# Altium PCB Programmer.PcbDoc
Units mm, origin at the board's own origin, x right, y up, seen from the top; angles counter-clockwise.
Board outline 20.57 x 33.15 mm, 2 copper layers (Top Layer, Bottom Layer); 3 components, 6 nets, 32 pads, 0 vias.
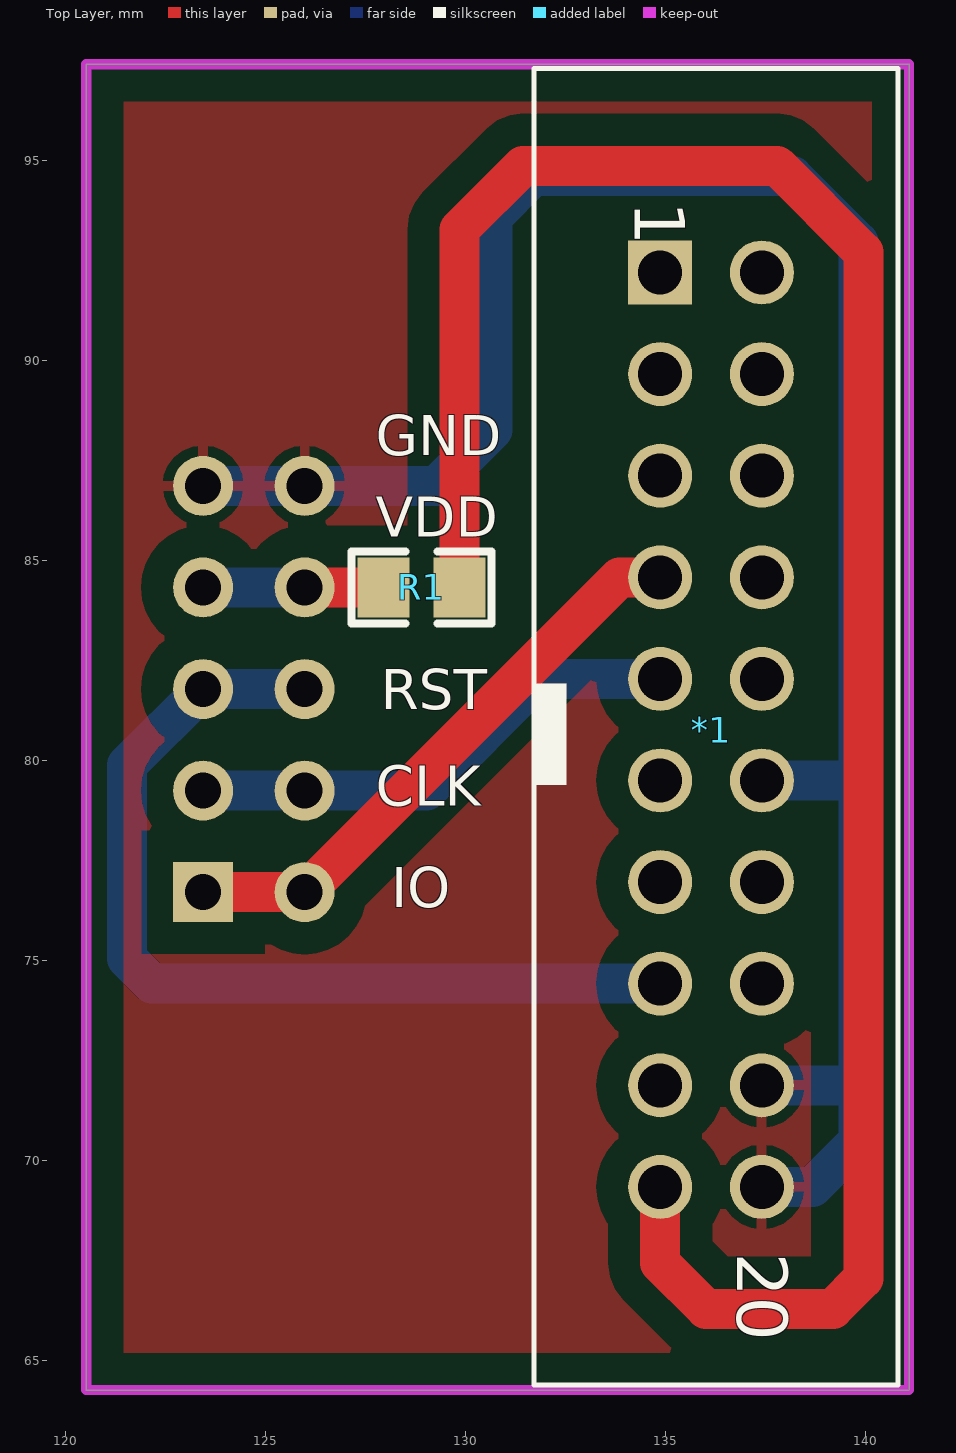
[diagram p0: Top Layer view]
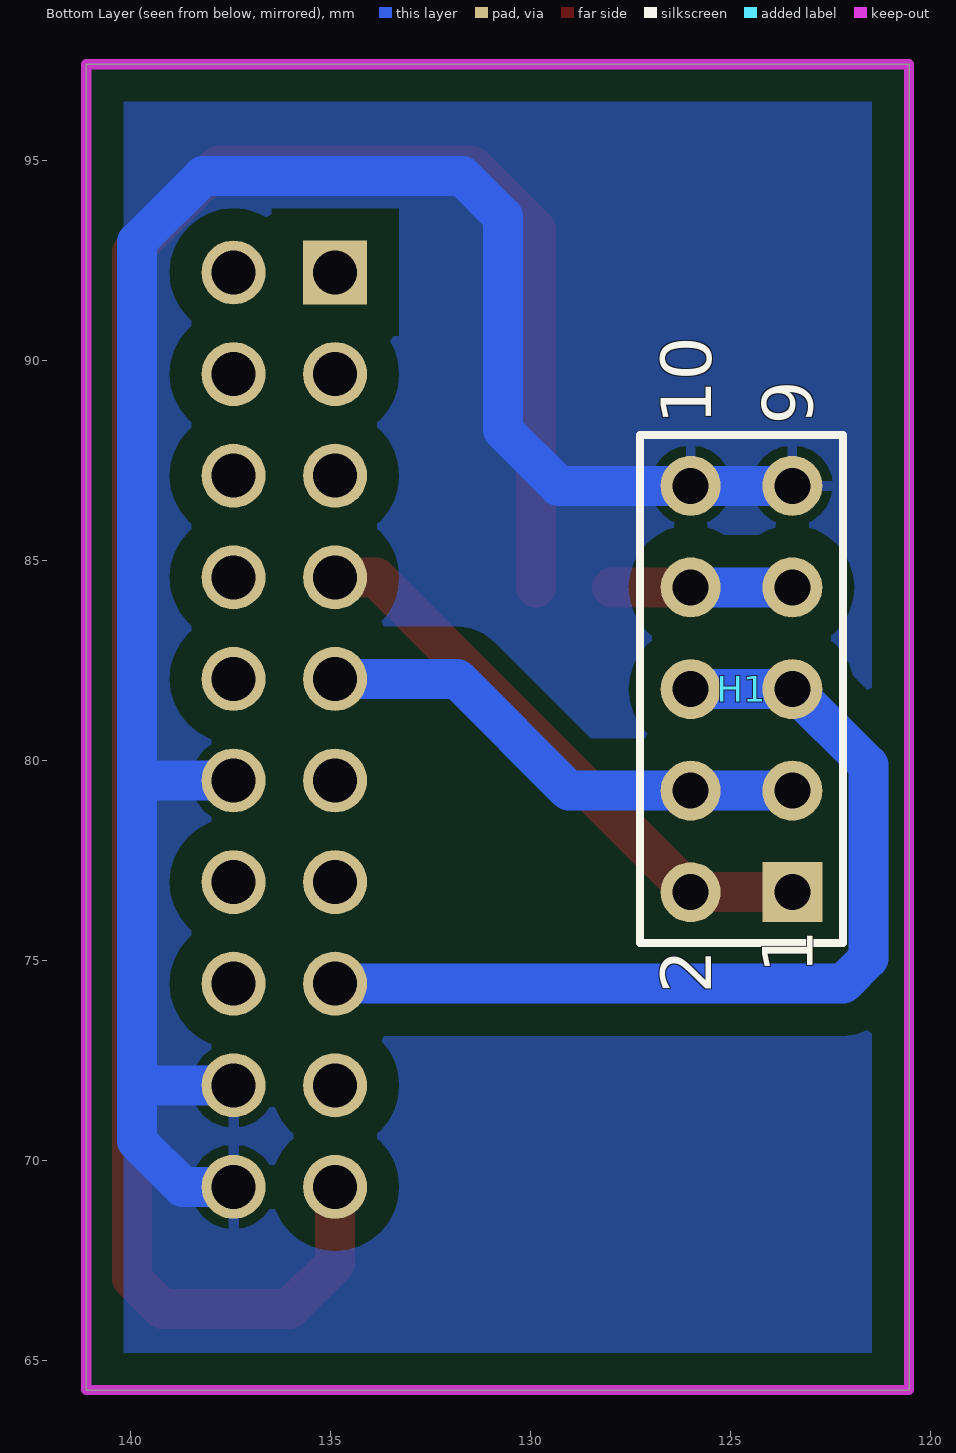
[diagram p1: Bottom Layer view, seen from below]

## Layer stack, top to bottom
Top Layer: signal copper 0.0356
Dielectric: dielectric 0.32, FR-4, Dk 4.8
Bottom Layer: signal copper 0.0356

## Board outline
120.523,64.262 120.523,97.409 141.097,97.409 141.097,64.262

## Design rules (kind name [scope] priority, off if disabled: settings)
Clearance [All] p1: gap=0.8
PolygonConnect [All] p1: connectstyle=Relief reliefconductorwidth=0.254 reliefentries=4 polygonreliefangle="90 Angle"
RoutingVias [All] p1: holewidth=0.711 width=1.27 viastyle="Through Hole" minholewidth=0.711 minwidth=1.27 maxholewidth=0.711 maxwidth=1.27
SilkscreenOverComponentPads SilkToSolderMaskClearance [IsPad] p1: minsilkscreentomaskgap=0.254
SolderMaskExpansion [All] p1: expansion=0.102
Width [All] p1: maxlimit=4 minlimit=0.254 preferedwidth=0.254 minimp=50.000000 maximp=50.000000 favimp=50.000000
27 further rules are at their usual default settings.

## Components (designator, comment, footprint, x,y, rotation, side; value= is the part's Value field where it differs from the comment)
*1 "IDC 2X10" "IDC 2X10" 136.144,80.772 r270 top
H1 "Header 5X2" HDR2X5 123.444,76.708 r90 bottom
R1 "0" "RES 0805" 128.905,84.328 r0 top

## Footprints (in the part's own frame and the unit in brackets; to place one, negate y for a bottom-side part, rotate by r counter-clockwise, add the part's x,y. Pads: shape width x height; smd on the part's side, far side on the other; paste and mask are expansions set on the pad)
HDR2X5 [mm] "Connector; Header; 5x2 Position"
  rect 1.5x1.5 hole 0.9: 1(0,0)
  round 1.5 hole 0.9: 2(0,2.54) 3(2.54,0) 4(2.54,2.54) 5(5.08,0) 6(5.08,2.54) 7(7.62,0) 8(7.62,2.54) 9(10.16,0) 10(10.16,2.54)
  silkscreen extent -1.27,-1.27 11.43,3.81, body extent -1.26,-1.27 11.31,3.81, height 8.39
"IDC 2X10" [mm]
  rect 1.6x1.6 hole 1.1: 1(-11.43,-1.27)
  round 1.6 hole 1.1: 2(-11.43,1.27) 3(-8.89,-1.27) 4(-8.89,1.27) 5(-6.35,-1.27) 6(-6.35,1.27) 7(-3.81,-1.27) 8(-3.81,1.27) 9(-1.27,-1.27) 10(-1.27,1.27) 11(1.27,-1.27) 12(1.27,1.27) 13(3.81,-1.27) 14(3.81,1.27) 15(6.35,-1.27) 16(6.35,1.27) 17(8.89,-1.27) 18(8.89,1.27) 19(11.43,-1.27) 20(11.43,1.27)
  silkscreen extent -16.53,-4.42 16.38,4.68, body extent -16.4,-4.08 16.3,4.42, height 9
"RES 0805" [mm] "Chip Resistor, 2-Leads, Body 2.0x1.3mm, IPC High Density _ (0.100 W)"
  rect 1.3x1.5 smd: 1(-0.95,0) 2(0.95,0)
  silkscreen extent -1.75,-0.9 1.75,0.9, body extent -1,-0.62 1,0.63, height 0.55

## Part data
H1: "Header, 5-Pin, Dual row"
R1: library part Res, "Resistor"

## Nets (pads, with @x,y where several pads share a name; then routed paths per layer and width w, separated by ;. In a path a pad name is that pad's centre, name@x,y a point inside that pad or via, vN(x,y) a via of type N, cw(c..) or ccw(c..) an arc to the next point about the centre after c; other vN are vias at no path point)
GND: *1.12 *1.18 *1.20 H1.9 H1.10 | length 53.2
  Bottom Layer w1: H1.9@123.952,86.868 129.286,86.868 130.683,88.265 130.683,93.599 131.699,94.615 138.176,94.615 139.827,92.964 139.827,79.756 ; *1.20 138.684,69.342 139.827,70.485 139.827,72.009 ; *1.18 139.7,71.882 139.827,72.009 ; *1.12 139.573,79.502 139.827,79.756 ; 139.827,72.009 139.827,79.756
Net*1_19: *1.19 R1.2 | length 54
  Top Layer w1: R1.2 129.855,93.279 131.445,94.869 137.795,94.869 139.954,92.71 139.954,67.056 139.192,66.294 136.017,66.294 134.874,67.437 *1.19
RESET: *1.15 H1.5 H1.6 | length 23.7
  Bottom Layer w1: H1.6 H1.5 121.539,79.883 121.539,75.057 122.174,74.422 *1.15
SWCLK: *1.9 H1.3 H1.4 | length 12.1
  Bottom Layer w1: H1.3@123.952,79.248 129.032,79.248 131.826,82.042 *1.9
SWDIO: *1.7 H1.1 H1.2 | length 14.2
  Top Layer w1: H1.1@123.952,76.708 H1.2 133.858,84.582 *1.7
VDD: H1.7 H1.8 R1.1 | length 4.5
  Top Layer w1: H1.8 R1.1
  Bottom Layer w1: H1.7 H1.8
pads on no net: *1.1 *1.2 *1.3 *1.4 *1.5 *1.6 *1.8 *1.10 *1.11 *1.13 *1.14 *1.16 *1.17

## Polygon pours and split planes (outlines as drawn)
GND on Bottom Layer "Bottom Layer-No Net" (solid, remove dead copper, pour order 0): 140.97,97.409 120.523,97.409 120.523,64.262 141.097,64.262 141.097,97.409
GND on Top Layer "Bottom Layer-No Net" (solid, remove dead copper, pour order 2): 141.097,97.409 120.523,97.409 120.523,64.262 141.097,64.262 141.097,97.409

## Keep-outs
Keep-Out Layer:
  the board outline again, w0.254

## Silkscreen, mask and mechanical layers (free items; w line width, h text height)
Top Overlay:
  text "GND" at 127.762,87.63 h1
  text "VDD" at 127.762,85.598 h1
  text "RST" at 127.889,81.28 h1
  text "CLK" at 127.762,78.867 h1
  text "IO" at 128.143,76.327 h1
Top Solder:
  rectangle: 127.889,66.068 128.778,66.957
  rectangle: 129.794,66.068 130.683,66.957
  rectangle: 127.889,67.815 128.778,68.704
  rectangle: 129.794,67.815 130.683,68.704
  rectangle: 127.889,69.561 128.778,70.45
  rectangle: 129.794,69.561 130.683,70.45
  rectangle: 127.889,71.307 128.778,72.196
  rectangle: 129.794,71.307 130.683,72.196
  rectangle: 127.889,73.053 128.778,73.942
  rectangle: 129.794,73.053 130.683,73.942
  text "GND" at 123,72.898 h1.2
  text "VDD" at 123.063,71.152 h1.2
  text "RESET" at 122.12,69.406 h1.2
  text "SWCLK" at 121.9,67.659 h1.2
  text "SWDIO" at 122.189,65.913 h1.2
Bottom Solder:
  rectangle: 129.54,65.587 130.429,66.476
  rectangle: 127.635,65.587 128.524,66.476
  rectangle: 129.54,67.175 130.429,68.064
  rectangle: 127.635,67.175 128.524,68.064
  rectangle: 129.54,68.762 130.429,69.651
  rectangle: 127.635,68.762 128.524,69.651
  rectangle: 129.54,70.35 130.429,71.239
  rectangle: 127.635,70.35 128.524,71.239
  rectangle: 129.54,71.937 130.429,72.826
  rectangle: 127.635,71.937 128.524,72.826
  text "GND" at 125.667,71.882 h1
  text "VDD" at 125.615,70.294 h1
  text "RESET" at 126.4,68.707 h1
  text "SWCLK" at 126.584,67.12 h1
  text "SWDIO" at 126.343,65.532 h1

## Text inside footprints (layer, text, board x,y; h text height)
*1: Top Overlay "1" at 134.239,93.98 h1.27 r270; Top Overlay "20" at 136.804,67.694 h1.27 r270
H1: Bottom Overlay "2" at 125.476,74.168 h1.27 r270; Bottom Overlay "1" at 122.936,74.676 h1.27 r270; Bottom Overlay "9" at 122.936,88.392 h1.27 r270; Bottom Overlay "10" at 125.476,88.392 h1.27 r270